# EAGLE board BigTime-v11 (EAGLE 5.10)
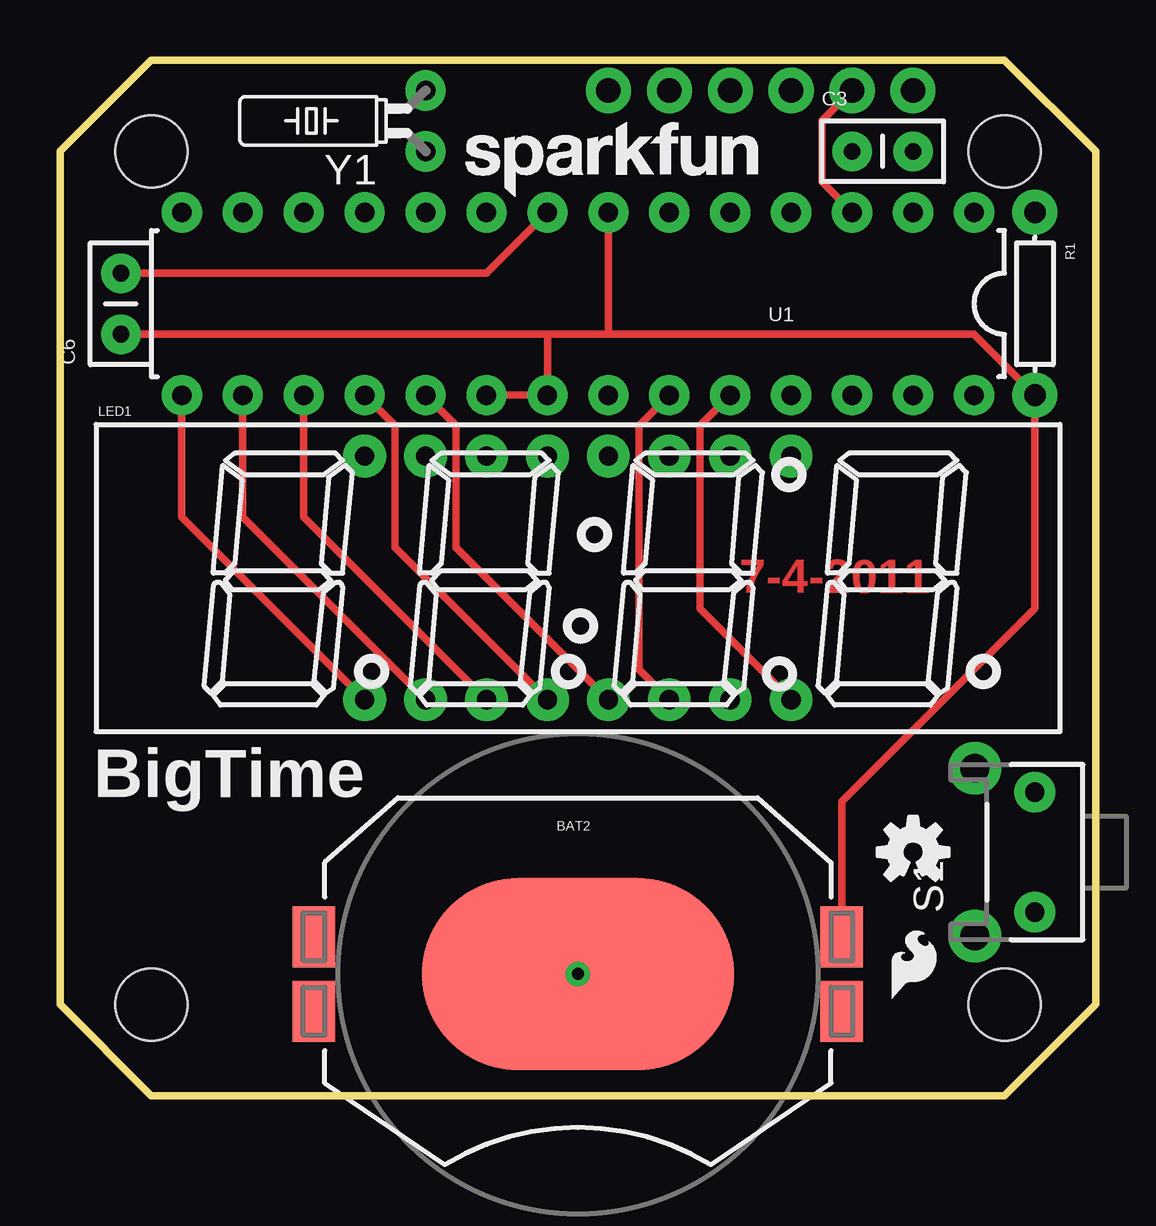
[diagram p0: board, top side]
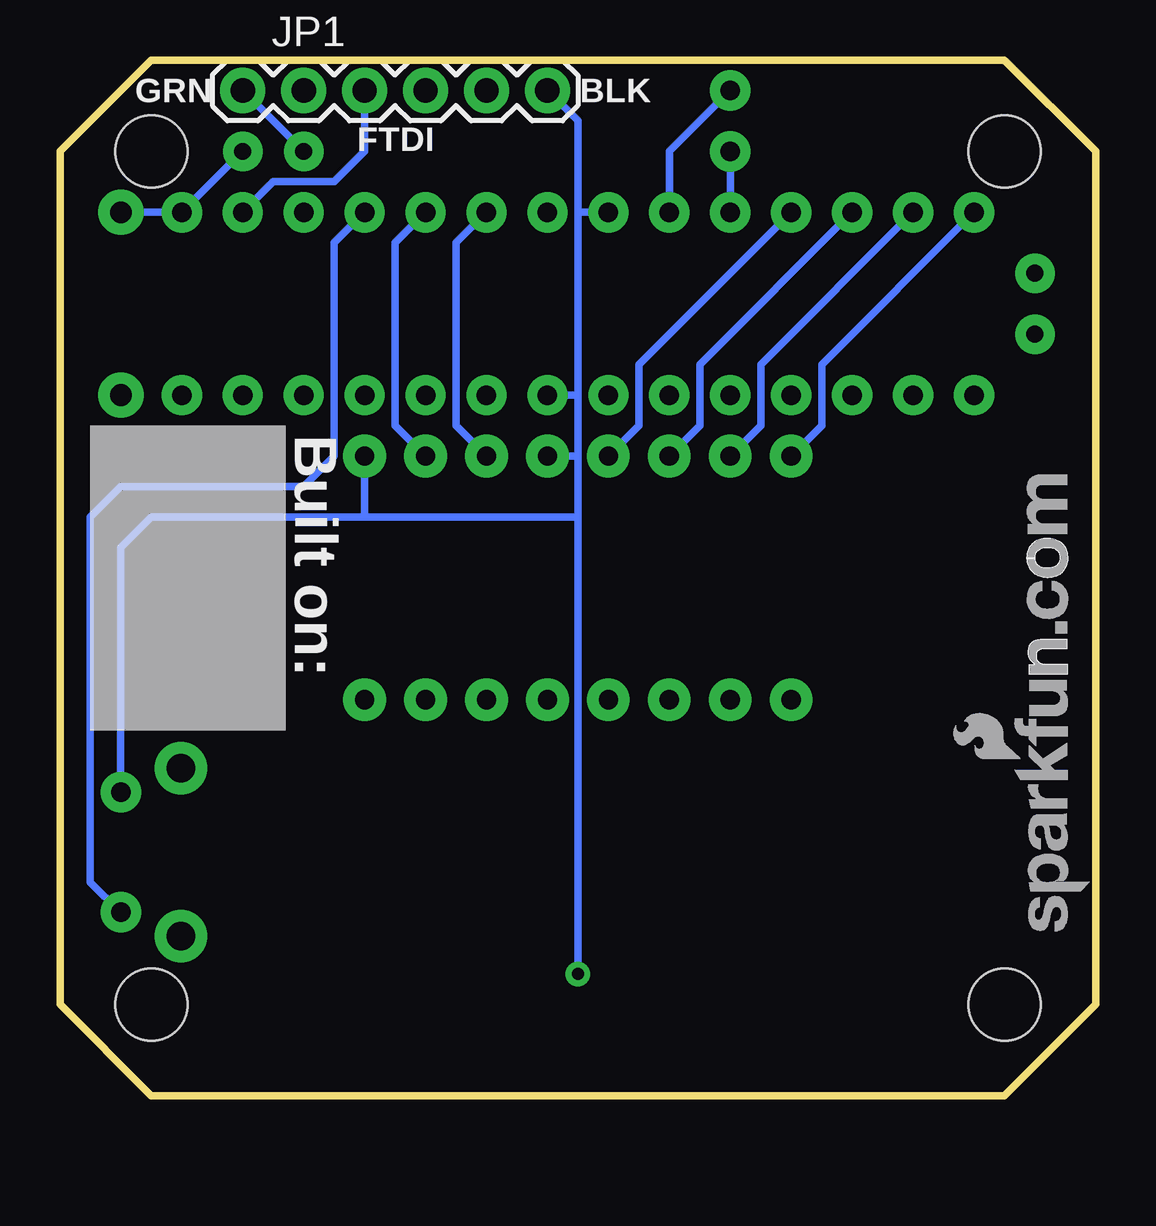
[diagram p1: board, bottom side, seen from below]

Size 43.18 x 43.18 mm. Coordinates in mm from the lower left corner, seen from the top.
Outline: 0,39.37 0,3.81 3.81,0 39.37,0 43.18,3.81 43.18,39.37 39.37,43.18 3.81,43.18 0,39.37
Copper layers (1*16): Top 0.035mm / dielectric 1.5mm / Bottom 0.035mm
Design rules "SparkFun": minimum track width 8mil, minimum drill 20mil, track to track 8mil, track to pad 8mil, pad to pad 8mil, via to via 8mil, smd to smd 8mil, copper to edge 10mil, drill to drill 8mil, minimum pad ring 12mil, minimum via ring 10mil, stop-mask expansion 4mil, vias tented up to drill 25mil, thermal gap 10mil
Holes 3 mm at 3.81,39.37 39.37,3.81 39.37,39.37 3.81,3.81

## Footprints (pad centres in the part's own frame; a part is rotated, then mirrored left to right if it is on the bottom)
BATTCON_20MM_4LEGS = smd 1.778 x 2.54: 1 -11,1.55; 3 11,1.55; P$1 -11,-1.55; P$2 11,-1.55 | smd 13 x 8: 2 0,0
CAP-PTH-SMALL2 = drill 0.7 pad 1.651 round: 1 0,0; 2 2.54,0
FTDI_BASIC = drill 1.016 pad 1.88 round: CTS 10.16,0; DTR 0,0; GND 12.7,0; RXI 2.54,0; TXO 5.08,0; VCC 7.62,0
7-SEGMENT-4DIGIT-YOUNGSUN = drill 0.8 pad 1.778 round: 1 -8.89,-5.08; 2 -6.35,-5.08; 3 -3.81,-5.08; 4 -1.27,-5.08; 5 1.27,-5.08; 6 3.81,-5.08; 7 6.35,-5.08; 8 8.89,-5.08; 9 8.89,5.08; 10 6.35,5.08; 11 3.81,5.08; 12 1.27,5.08; 13 -1.27,5.08; 14 -3.81,5.08; 15 -6.35,5.08; 16 -8.89,5.08
AXIAL-0.3 = drill 0.9 pad 1.88 round: P$1 -3.81,0; P$2 3.81,0
TACTILE-PTH-SIDE = drill 0.8 pad 1.7 round: 1 -2.5,0; 2 2.5,0 | drill 1.2 pad 2.2 round: ANCHOR1 -3.5,2.5; ANCHOR2 3.5,2.5
DIL28-3-SIMON = drill 0.813 pad 1.676 round: 1 -16.51,-3.81; 2 -13.97,-3.81; 3 -11.43,-3.81; 4 -8.89,-3.81; 5 -6.35,-3.81; 6 -3.81,-3.81; 7 -1.27,-3.81; 8 1.27,-3.81; 9 3.81,-3.81; 10 6.35,-3.81; 11 8.89,-3.81; 12 11.43,-3.81; 13 13.97,-3.81; 14 16.51,-3.81; 15 16.51,3.81; 16 13.97,3.81; 17 11.43,3.81; 18 8.89,3.81; 19 6.35,3.81; 20 3.81,3.81; 21 1.27,3.81; 22 -1.27,3.81; 23 -3.81,3.81; 24 -6.35,3.81; 25 -8.89,3.81; 26 -11.43,3.81; 27 -13.97,3.81; 28 -16.51,3.81
TC26H = drill 0.813 pad 1.676 round: 1 -1.27,0; 2 1.27,0

## Placement (x,y rotation side)
BAT2  [BATTCON_20MM_4LEGS]  21.59,5.08 0 top
C3  0.1uF  [CAP-PTH-SMALL2]  33.02,39.37 0 top
C6  0.1uF  [CAP-PTH-SMALL2]  2.54,31.75 90 top
JP1  FTDI_BASICPTH  [FTDI_BASIC]  35.56,41.91 0 bottom
LED1  7-SEGMENT-4DIGIT  [7-SEGMENT-4DIGIT-YOUNGSUN]  21.59,21.59 0 top
R1  10k  [AXIAL-0.3]  40.64,33.02 270 top
S1  Switch  [TACTILE-PTH-SIDE]  40.64,10.16 90 top
U1  ATmega328  [DIL28-3-SIMON]  21.59,33.02 180 top
U$1  LOGO-SFESK  [SFE-LOGO-FLAME]  34.67,4.06 0 top
U$2  CREATIVE_COMMONS  [CREATIVE_COMMONS]  -6.35,-10.16 0 top  (outside the outline)
U$3  LOGO-SFENEW  [SFE-NEW-WEBLOGO]  0.25,6.86 90 bottom
U$4  OSHW-LOGOS  [OSHW-LOGO-S]  35.56,10.16 0 top
U$5  LOGO-SFENW2  [SFE-NEW-WEB]  16.89,37.47 0 top
Y1  32.768kHz  [TC26H]  15.24,40.64 90 top

## Library data of the parts
BAT2 = Testing
C3 C6 JP1 LED1 R1 S1 U1 U$1-U$5 Y1 = SparkFun

## Nets
A: LED1.14 U1.12
AMPM: LED1.10 U1.5
B: LED1.16 U1.14
BTN: S1.1 U1.4
C: LED1.13 U1.11
COL: LED1.4 U1.18
D: LED1.3 U1.17
DIG1: LED1.1 U1.15
DIG2: LED1.2 U1.16
DIG3: LED1.6 U1.23
DIG4: LED1.8 U1.24
DP: LED1.7
E: LED1.5 U1.19
F: LED1.11 U1.6
G: LED1.15 U1.13
GND: BAT2.2 C6.2 JP1.GND LED1.9 LED1.12 S1.2 U1.8 U1.22
N$1: U1.9 Y1.2
N$2: U1.10 Y1.1
N$3: C3.1 JP1.DTR
RST: C3.2 R1.P$1 U1.1
RXI: JP1.TXO U1.2
TXO: JP1.RXI U1.3
VCC: BAT2.3 C6.1 R1.P$2 U1.7 U1.20 U1.21

## Tracks (layer width: path | path; a pad name or v marks a point on that pad's centre or on a via)
A
  Bottom 0.305: U1.12 16.51,30.48 16.51,27.94 LED1.14
AMPM
  Bottom 0.305: U1.5 29.21,35.56 29.21,27.94 LED1.10
B
  Bottom 0.305: U1.14 11.43,30.48 11.43,27.94 LED1.16
BTN
  Bottom 0.305: U1.4 31.75,35.56 31.75,26.67 33.02,25.4 40.64,25.4 41.91,24.13 41.91,8.89 40.68,7.66 S1.1
C
  Bottom 0.305: U1.11 19.05,30.48 19.05,27.94 LED1.13
COL
  Top 0.305: U1.18 13.97,27.94 13.97,22.86 LED1.4
D
  Top 0.305: LED1.3 10.16,24.13 U1.17
DIG1
  Top 0.305: LED1.1 5.08,24.13 U1.15
DIG2
  Top 0.305: LED1.2 7.62,24.13 U1.16
DIG3
  Top 0.305: U1.23 24.13,27.94 24.13,17.78 LED1.6
DIG4
  Top 0.305: U1.24 26.67,27.94 26.67,20.32 LED1.8
E
  Top 0.305: U1.19 16.51,27.94 16.51,22.86 LED1.5
F
  Bottom 0.305: U1.6 26.67,35.56 26.67,27.94 LED1.11
G
  Bottom 0.305: U1.13 13.97,30.48 13.97,27.94 LED1.15
GND  (via drill 0.51)
  Top 0.305: C6.2 17.78,34.29 U1.8
  Bottom 0.305: BAT2.2 21.59,24.13 | 21.59,24.13 21.59,26.67 | 21.59,26.67 21.59,29.21 | 21.59,29.21 U1.22 | 21.59,26.67 LED1.12 | 21.59,24.13 30.48,24.13 | 30.48,24.13 LED1.9 | S1.2 40.64,22.86 39.37,24.13 30.48,24.13 | 21.59,29.21 21.59,36.83 | 21.59,36.83 21.59,40.64 JP1.GND | 21.59,36.83 U1.8
  other vias: 21.59,5.08
N$1
  Bottom 0.305: Y1.2 17.78,39.37 U1.9
N$2
  Bottom 0.305: U1.10 Y1.1
N$3
  Bottom 0.305: C3.1 JP1.DTR
RST
  Bottom 0.305: C3.2 U1.1 R1.P$1
RXI
  Bottom 0.305: U1.2 34.29,38.1 31.75,38.1 30.48,39.37 JP1.TXO
TXO
  Top 0.305: U1.3 31.75,38.1 31.75,40.64 JP1.RXI
VCC
  Top 0.305: 22.86,31.75 U1.7 | 22.86,31.75 38.1,31.75 R1.P$2 40.64,20.32 32.59,12.27 BAT2.3 | 20.32,31.75 22.86,31.75 | C6.1 20.32,31.75 | 20.32,31.75 U1.21 U1.20

## Text on the board
Top: 7-4-2011
tPlace: BigTime | N. Seidle
bPlace: BLK | GRN | FTDI | Built on: